# Altium PCB PCB1.PcbDoc
Units mil, origin at the board's own origin, x right, y up, seen from the top; angles counter-clockwise.
Board outline 3090 x 1190 mil, 4 copper layers (Top Layer, Inner Layer 1, Inner Layer 2, Bottom Layer), stack 61.34 mil thick; 31 components, 23 nets, 125 pads, 151 vias.
Unrouted connection lines stored in the file: 6.
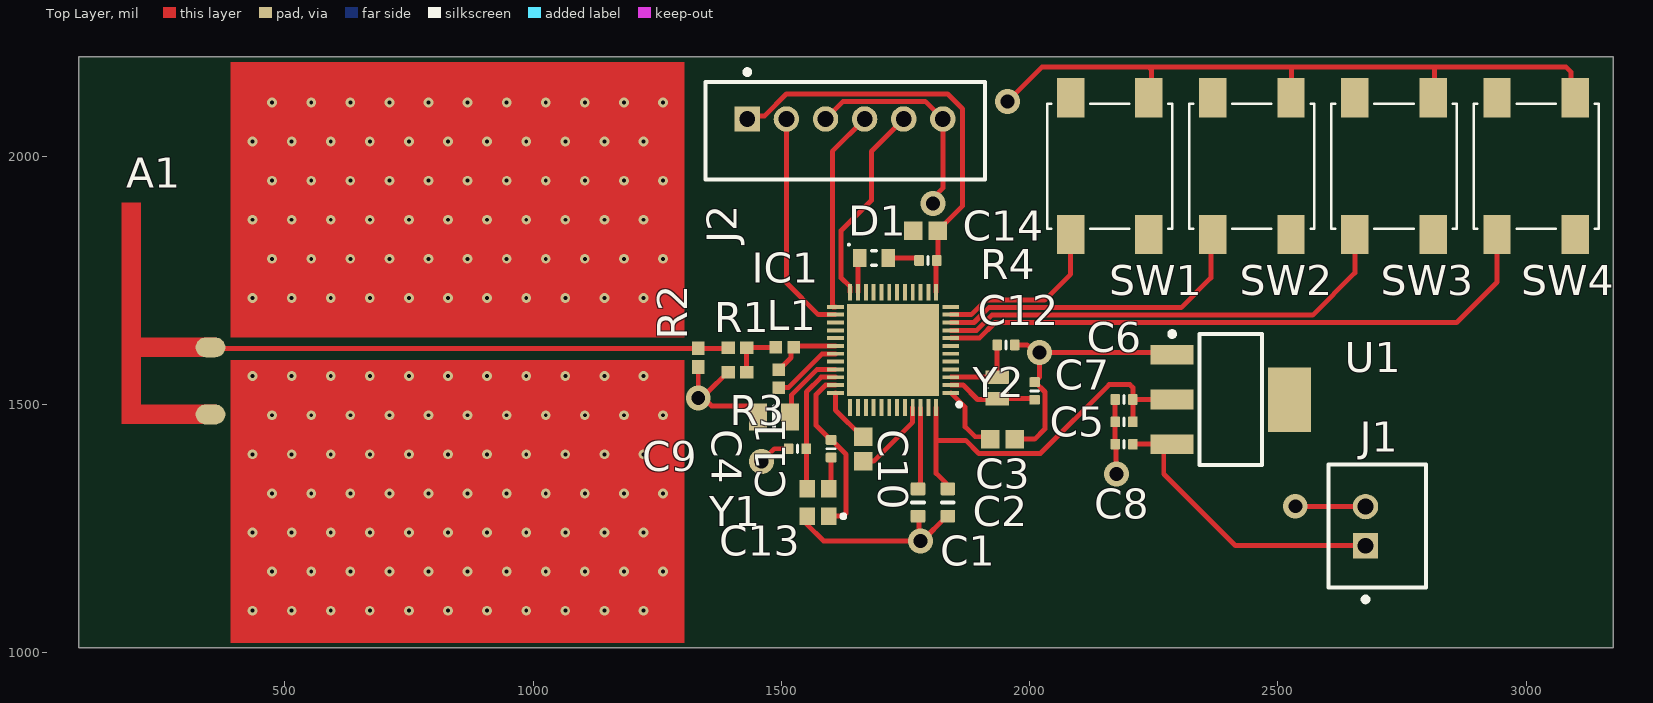
[diagram p0: Top Layer view]
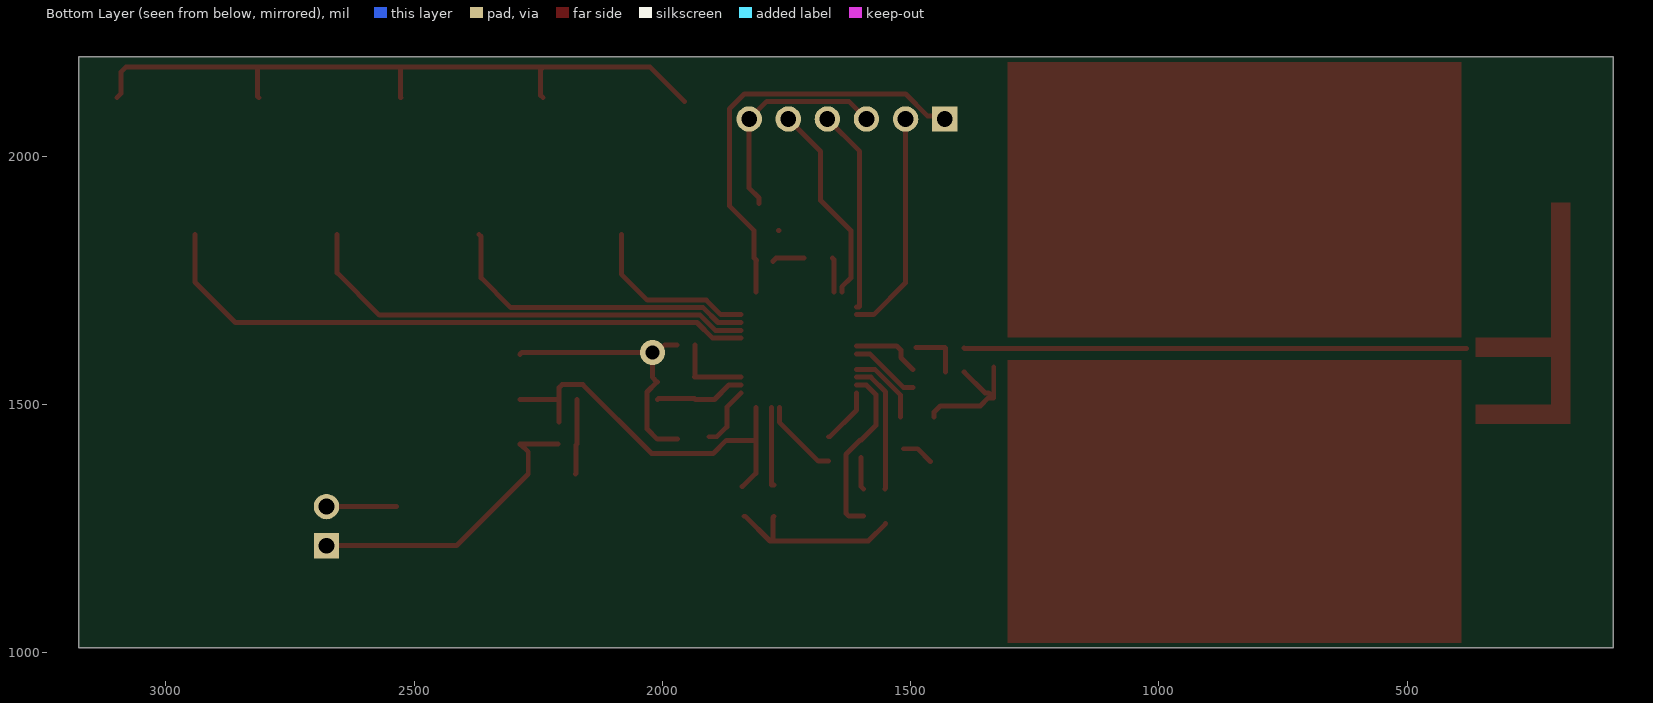
[diagram p1: Bottom Layer view, seen from below]
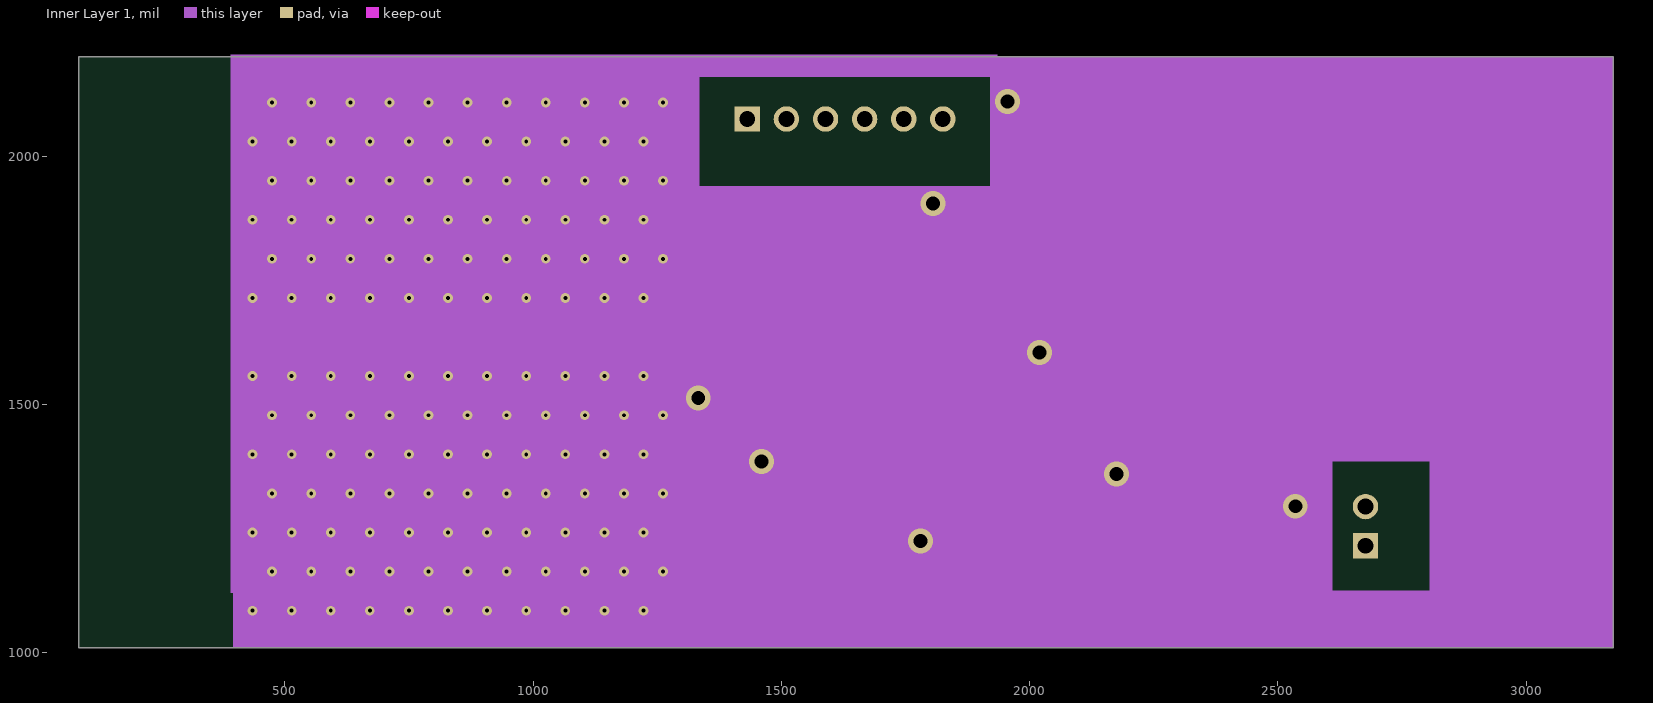
[diagram p2: Inner Layer 1]
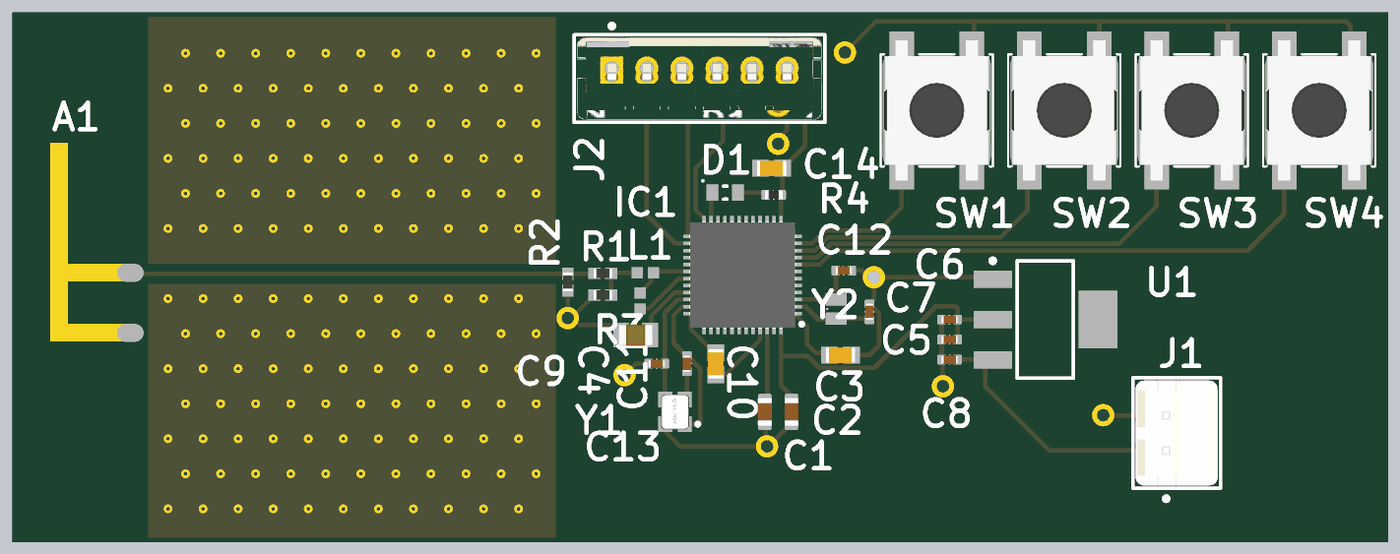
[diagram p3: 3D render of the assembled board from above, using the file's embedded part models]

## Layer stack, top to bottom
Top Solder: solder mask 0.6, Solder Resist, Dk 3.8
Top Layer: signal copper 1.378
Dielectric 1: prepreg 8.583, NP-155F, Dk 4.4
Dielectric 2: prepreg 8.583, NP-155F, Dk 4.4
Dielectric 3: prepreg 7.992, NP-155F, Dk 4.4
Inner Layer 1: signal copper 1.181
Dielectric 4: core 5.906, NP-155F, Dk 4.36
Inner Layer 2: signal copper 1.181
Dielectric 5: prepreg 7.992, NP-155F, Dk 4.4
Dielectric 6: prepreg 8.583, NP-155F, Dk 4.4
Dielectric 7: prepreg 8.583, NP-155F, Dk 4.4
Bottom Layer: signal copper 1.378
Bottom Solder: solder mask 0.6, Solder Resist, Dk 3.8

## Board outline
85,1010 85,2200 3175,2200 3175,1010

## Design rules (kind name [scope] priority, off if disabled: settings)
Clearance [All] p1: gap=5 ignorepadtopadclearanceinfootprint=TRUE
PolygonConnect [All] p1: connectstyle=Relief reliefconductorwidth=10 reliefentries=4 polygonreliefangle="90 Angle" airgapwidth=10
RoutingVias [All] p1: holewidth=28 width=50 viastyle="Through Hole" minholewidth=28 minwidth=50 maxholewidth=28 maxwidth=50
SolderMaskExpansion [All] p1: expansion=0 istentingtop=FALSE
SupplyNets "Schematic Supply Nets" [InNet('GND')] p1: voltage=0.000
Width [All] p1: maxlimit=10 minlimit=10 preferedwidth=10
30 further rules are at their usual default settings.

## Components (designator, comment, footprint, x,y, rotation, side; value= is the part's Value field where it differs from the comment)
A1 "Inverted-F Antenna" "New footprint 1" 190,1617.5 r90 top net-tie
C1 "Capacitor 1µF +/-0.1% 25V 0603" CAPC0603(1608)100_L 1775,1302.44 r90 top value=1µF
C2 "Capacitor 4.7µF +/-20% 10V 0603" CAPC0603(1608)100_L 1835,1302.44 r270 top value=4.7µF
C3 "Capacitor 100 nF +/-10% 50 V 0603" CAPC1608X90X40NL10T20 1945,1430 r180 top value=100nF
C4 "Capacitor 12pF +/-10% 50V 0402" CAPC0402(1005)33_L 1600,1410.83 r270 top value=12pF
C5 "Capacitor 12pF +/-10% 50V 0402" CAPC0402(1005)33_L 2190,1465 r0 top value=10uF
C6 "Capacitor 12pF +/-10% 50V 0402" CAPC0402(1005)33_L 2190,1510 r0 top value=10nF
C7 "Capacitor 12pF +/-10% 50V 0402" CAPC0402(1005)33_L 2010,1527.28 r270 top value=12pF
C8 "Capacitor 12pF +/-10% 50V 0402" CAPC0402(1005)33_L 2190,1420 r0 top value=10uF
C9 "Capacitor 12pF +/-10% 50V 0402" CAPC0402(1005)33_L 1532.28,1410.81 r180 top value=12pF
C10 "Capacitor 100 nF +/-10% 50 V 0603" CAPC1608X90X40NL10T20 1665,1410.39 r90 top value=100nF
C11 "100pF" CAPC2012X135N 1485,1475 r0 top
C12 "Capacitor 12pF +/-10% 50V 0402" CAPC0402(1005)33_L 1952.28,1620 r180 top value=12pF
C13 "04023J0R8ABSTR" CAPC1005X06N 1495,1551.89 r270 top value=0.8pF
C14 "Capacitor 100 nF +/-10% 50 V 0603" CAPC1608X90X40NL10T20 1790.39,1850 r0 top value=100nF
D1 "LED_STATUS" CAPCP1508X06N 1686.26,1795 r0 top
IC1 "NRF52810-QFAA-R" QFN40P600X600X90-49N-D 1725,1610 r180 top
J1 "LiPo CONN" FP-440054-2-MFG 2700,1255 r270 top
J2 "440054-6" FP-440054-6-MFG 1628.15,2051.38 r180 top
L1 "0402R-3N9J" CAPC1005X06N 1506.89,1615 r180 top value=3.9nH
R1 "Resistor 0R 0402 63 mW" RESC1005X40X25ML05T10 1411.3,1614.02 r0 top value=0
R2 "Resistor 0R 0402 63 mW" RESC1005X40X25ML05T10 1332.4,1594.33 r90 top value=0
R3 "Resistor 0R 0402 63 mW" RESC1005X40X25ML05T10 1411.3,1565 r0 top value=0
R4 "Resistor 2K2  +/-5 % 0402 63 mW" RESC0402(1005)_L 1795,1790 r0 top value=2.2k
SW1 "Switch" 430471035826 2161.26,1980 r90 top
SW2 "Switch" 430471035826 2447.51,1980 r90 top
SW3 "Switch" 430471035826 2733.75,1980 r90 top
SW4 "Switch" 430471035826 3020,1980 r90 top
U1 "TC2117-3.3VDBTR" SOT-223-DB3_N 2405,1510 r0 top
Y1 "ABM11AIG-32.000MHZ-4Z-T3" ABM11AIG16000MHZ81ZT 1573.35,1302.44 r90 top
Y2 "32,768kHz" 1TJH125DR1A0058 1935,1533.35 r270 top

## Footprints (in the part's own frame and the unit in brackets; to place one, negate y for a bottom-side part, rotate by r counter-clockwise, add the part's x,y. Pads: shape width x height; smd on the part's side, far side on the other; paste and mask are expansions set on the pad)
1TJH125DR1A0058 [mm]
  rect 0.7x1.2 smd: 1(-0.55,0) 2(0.55,0)
  silkscreen extent 0,-0.55 0,0.55
430471035826 [mm] "SMD Tact Switch, body 6x6mm"
  rect 2x1.4 smd: A1(-3.5,2) A2(3.5,2) B1(-3.5,-2) B2(3.5,-2)
  silkscreen extent -3.2,-3.2 3.2,3.2, body extent -4,-3.1 4,3.1, height 3.5
ABM11AIG16000MHZ81ZT [mm]
  rect 0.9x0.8 smd: 1(-0.7,-0.55) 2(0.7,-0.55) 3(0.7,0.55) 4(-0.7,0.55)
  silkscreen extent -0.8,-1.4 -0.6,-1.2, body extent -1,-0.8 1,0.8, height 0.55
CAPC0402(1005)33_L [mm] "Chip Capacitor, Body 1.0x0.5mm, Height 0.33mm, IPC High Density"
  rrect25% 0.5x0.55 smd: 1(-0.45,0) 2(0.45,0)
  silkscreen extent 0,-0.2 0,0.2, body extent -0.5,-0.25 0.5,0.25, height 0.55
CAPC0603(1608)100_L [mm] "Chip Capacitor, Body 1.6x0.8mm, Height 1.0mm, IPC High Density"
  rrect25% 0.66x0.76 smd: 1(-0.7,0) 2(0.7,0)
  silkscreen extent 0,-0.3 0,0.3, body extent -0.8,-0.4 0.8,0.4, height 0.95
CAPC1005X06N [mm] "Chip Capacitor, 2-Leads, Body 1,00x0,50mm, IPC Medium Density"
  rect 0.64x0.64 smd: 1(-0.46,0) 2(0.46,0)
  body extent -0.55,-0.3 0.55,0.3, height 0.6
CAPC1608X90X40NL10T20 [mm] "Chip Capacitor, 2-Leads, Body 1.70x0.90mm, IPC Medium Density"
  rect 0.95x0.95 smd: 1(-0.625,0) 2(0.625,0)
  body extent -0.85,-0.45 0.85,0.45, height 0.9
CAPC2012X135N [mm]
  rect 0.91x1.39 smd: 1(-0.82,0) 2(0.82,0)
  silkscreen extent 0,-0.53 0,0.53, body extent -1,-0.63 1,0.63, height 1.35
CAPCP1508X06N [mm] "Chip Capacitor, 2-Leads, Body 1,55x0,80mm, IPC Medium Density"
  rect 0.68x0.94 smd: 1(-0.73,0) 2(0.73,0)
  silkscreen extent -1.33,-0.37 0.1,0.73, body extent -0.85,-0.45 0.85,0.45, height 0.6
FP-440054-2-MFG [mm]
  rect 1.3x1.3 hole 0.8 paste-2539.97 mask+0: 1(1,-0.6)
  round 1.3 hole 0.8 paste-2539.97 mask+0: 2(-1,-0.6)
  silkscreen extent -3.15,-2.5 3.87,2.5, body extent -3.25,-2.6 3.25,2.6, height 0.25
FP-440054-6-MFG [mm]
  rect 1.3x1.3 hole 0.8 paste-2539.97 mask+0: 1(5,-0.6)
  round 1.3 hole 0.8 paste-2539.97 mask+0: 2(3,-0.6) 3(1,-0.6) 4(-1,-0.6) 5(-3,-0.6) 6(-5,-0.6)
  silkscreen extent -7.15,-3.12 7.15,2.5, body extent -7.25,-2.6 7.25,2.6, height 0.25
"New footprint 1" [mil]
  oval 40x60 smd: 1(-2.5,-160) 2(-137.5,-160)
  Top Layer region: 289.59,-20 289.59,19.37 -156.87,19.37 -156.87,-20
  Top Layer region: -21.87,-171.97 17.5,-171.97 17.5,19.37 -21.87,19.37
  Top Layer region: -156.87,-171.97 -117.5,-171.97 -117.5,19.37 -156.87,19.37
QFN40P600X600X90-49N-D [mm]
  rect 0.85x0.2 smd: 1(-2.95,2.2) 2(-2.95,1.8) 3(-2.95,1.4) 4(-2.95,1) 5(-2.95,0.6) 6(-2.95,0.2) 7(-2.95,-0.2) 8(-2.95,-0.6) 9(-2.95,-1) 10(-2.95,-1.4) 11(-2.95,-1.8) 12(-2.95,-2.2) 25(2.95,-2.2) 26(2.95,-1.8) 27(2.95,-1.4) 28(2.95,-1) 29(2.95,-0.6) 30(2.95,-0.2) 31(2.95,0.2) 32(2.95,0.6) 33(2.95,1) 34(2.95,1.4) 35(2.95,1.8) 36(2.95,2.2)
  rect 0.2x0.85 smd: 13(-2.2,-2.95) 14(-1.8,-2.95) 15(-1.4,-2.95) 16(-1,-2.95) 17(-0.6,-2.95) 18(-0.2,-2.95) 19(0.2,-2.95) 20(0.6,-2.95) 21(1,-2.95) 22(1.4,-2.95) 23(1.8,-2.95) 24(2.2,-2.95) 37(2.2,2.95) 38(1.8,2.95) 39(1.4,2.95) 40(1,2.95) 41(0.6,2.95) 42(0.2,2.95) 43(-0.2,2.95) 44(-0.6,2.95) 45(-1,2.95) 46(-1.4,2.95) 47(-1.8,2.95) 48(-2.2,2.95)
  rect 4.7x4.7 smd: 49(0,0)
  silkscreen extent -3.47,2.7 -3.28,2.9, body extent -3.05,-3.05 3.05,3.05, height 0.9
RESC0402(1005)_L [mm] "Chip Resistor, Body 1.0x0.5mm, IPC High Density"
  rrect25% 0.5x0.55 smd: 1(-0.45,0) 2(0.45,0)
  silkscreen extent 0,-0.2 0,0.2, body extent -0.5,-0.25 0.5,0.25, height 0.3
RESC1005X40X25ML05T10 [mm] "Chip Resistor, 2-Leads, Body 1.05x0.55mm, IPC Low Density"
  rect 0.7x0.65 smd: 1(-0.475,0) 2(0.475,0)
  body extent -0.53,-0.28 0.53,0.28, height 0.4
SOT-223-DB3_N [mm] "SOT223, 4-Leads, Body 6.5x3.5mm, Pitch 2.3mm, Lead Span 7mm, IPC Medium Density"
  rect 2.2x1 smd: 1(-3,2.3) 2(-3,0) 3(-3,-2.3)
  rect 2.2x3.3 smd: 4(3,0)
  silkscreen extent -3.12,-3.35 1.6,3.47, body extent -1.85,-3.35 1.85,3.35, height 1.8

## Part data
A1: library part CMP-00025-00003-2, "FR4 material 2.48GHz Inverted-F antenna", Frequency=2.4GHz
C1: library part CMP-001-00055-4, "Chip Capacitor, 1µF +/-0.1%, 25V, 0603, Thickness 1 mm", Case/Package=0603, Max Operating Temperature=85°C, Min Operating Temperature=-55°C, Tolerance=20%, Voltage Rating=25V, Mounting Technology=SMT, Pins=2
C2: library part CMP-001-00076-4, "Chip Capacitor, 4.7µF +/-20%, 10V, 0603, Thickness 1 mm", Case/Package=0603, Max Operating Temperature=85°C, Min Operating Temperature=-55°C, Tolerance=10%, Voltage Rating=10V, Mounting Technology=SMT, Pins=2
C3 C10 C14: library part CMP-001-00017-6, "Chip Capacitor, 100 nF, +/- 10%, 50 V, 0603 (1608 Metric)", Capacitor Type=Ceramic, Case/Package=0603, Max Operating Temperature=125°C, Min Operating Temperature=-55°C, Tolerance=10%, Voltage Rating=50V, Mounting Technology=SM, Pins=2, RoHS Compliant=True
C4 C5 C6 C7 C8 C9 C12: library part CMP-001-00072-4, "Chip Capacitor, 12pF +/-10%, 50V, 0402, Thickness 0.33 mm", Case/Package=0402, Max Operating Temperature=85°C, Min Operating Temperature=-55°C, Tolerance=20%, Voltage Rating=50V, Mounting Technology=SMT, Pins=2
C11: library part CL21C101JC61PNC, "Capacitor", Manufacturer_Name=SAMSUNG, Mouser Part Number=187-CL21C101JC61PNC, Arrow Part Number=CL21C101JC61PNC, Arrow Price/Stock=https://www.arrow.com/en/products/cl21c101jc61pnc/samsung-electro-mechanics?utm_currency=USD&region=nac, Datasheet Link=https://datasheet.datasheetarchive.com/originals/distributors/Datasheets-DGA8/2472830.pdf, Height=1.35mm, Manufacturer_Part_Number=CL21C101JC61PNC, Mouser Price/Stock=https://www.mouser.co.uk/ProductDetail/Samsung-Electro-Mechanics/CL21C101JC61PNC?qs=Ay79KZaUeZC4hCSSt5%2FdPg%3D%3D
C13: library part CMP-001-00091-1, "0402 0.8 pF 25 V ±0.5 pF Tolerance SMT Thin-Film RF/Microwave Capacitor", Case/Package=0402, Max Operating Temperature=125°C, Min Operating Temperature=-55°C, Voltage Rating=25V, Mounting Technology="Surface Mount", Pins=2
D1: library part CMP-004-00034-1, "1.6 X 0.8 MM SMD CHIP LED LAMP Single Color LED, Green, Water Clear, 0.7mm", Case/Package=0603, Forward Current=25mA, Forward Voltage=3.3V, Max Operating Temperature=85°C, Min Operating Temperature=-40°C, Mounting Technology="Surface Mount"
IC1: "Integrated Circuit", Manufacturer_Name="Nordic Semiconductor", Mouser Part Number=949-NRF52810-QFAA-R, Arrow Part Number=NRF52810-QFAA-R, Arrow Price/Stock=https://www.arrow.com/en/products/nrf52810-qfaa-r/nordic-semiconductor?utm_currency=USD&region=nac, Datasheet Link=http://infocenter.nordicsemi.com/pdf/nRF52810_PS_v1.0.pdf, Height=0.9mm, Manufacturer_Part_Number=NRF52810-QFAA-R, Mouser Price/Stock=https://www.mouser.co.uk/ProductDetail/Nordic-Semiconductor/NRF52810-QFAA-R?qs=gt1LBUVyoHmUcm9gtTuf%252BA%3D%3D
J1: library part CMP-03369-000005-1, "CONN HEADER VERT 2POS 2MM", Current Rating=3A, Manufacturer="TE Connectivity", Manufacturer Part Number=440054-2, Temperature="-25°C to +85°C", Temperature Range High=+85°C, Temperature Range Low=-25°C, Voltage Rating=250V, Automotive=No, Category=Conn, ComponentLink2Description=Datasheet, ComponentLink2URL=https://www.te.com/usa-en/product-440054-2.datasheet.pdf, Conn Gender=Male, Conn Orientation=Vertical, Contact Material=Tin,Nickel, Device Class L1=Connectors, Device Class L2="Headers and Wire Housings", Device Class L3=unset, Digikey Description="CONN HEADER VERT 2POS 2MM", Footprint Url=https://www.te.com/commerce/DocumentDelivery/DDEController?Action=showdoc&DocId=Customer+Drawing%7F440054%7FF6%7Fpdf%7FEnglish%7FENG_CD_440054_F6.pdf%7F440054-2, Height=6.35mm, Lead Free=Yes, Mouser Description="Headers & Wire Housings 2.0mm HDR 2pos VERT HPI", Number Of Contacts=2, Number Of Rows=1, Octopart=https://octopart.com/440054-2-te+connectivity-40237927, Package=440054-2, Pitch=2mm, RoHS=TRUE
J2: library part CMP-002-00074-1, "Pin Header, Wire-to-Board, 2 mm, 1 Rows, 6 Contacts, Through Hole Straight, HPI Series", Max Operating Temperature=85°C, Min Operating Temperature=-25°C, Voltage Rating=250V, Connector Type="Header, Pin, Plug", Mounting Technology="Through Hole", Pins=6
L1: library part CMP-006-00024-1, "General Purpose Inductor, 0.0039uH, 5%, 1 Element, Ceramic-Core, SMD, 0402", Case/Package=0402, Current Rating=840mA, Max Operating Temperature=125°C, Min Operating Temperature=-40°C, Self Resonant Frequency=5.8GHz, Tolerance=5%, Max Current Rating=840mA, Mounting Technology="Surface Mount"
R1 R2 R3: library part CMP-009-00004-5, "Chip Resistor, 0 Ohm, 0.063 W, -55 to 155 degC, 0402 (1005 Metric)", Case/Package=0402, Max Operating Temperature=155°C, Min Operating Temperature=-55°C, Power=63mW, Voltage Rating=50V, Mounting Technology=SM, Pins=2, RoHS Compliant=True
R4: library part CMP-009-00166-3, "Chip Resistor, 2,2 kOhms, +/-5 %, 63 mW, -55 to 155 degC, 0402", Case/Package=0402, Max Operating Temperature=155°C, Min Operating Temperature=-55°C, Power=63mW, Tolerance=5%, Pins=2
SW1 SW2 SW3 SW4: library part CMP-011-00014-1, "Tactile Switch, 0.05A, 12Vdc, 260Gf, Smd Rohs Compliant: Yes", Current Rating=50mA, Max Operating Temperature=85°C, Min Operating Temperature=-40°C, Voltage Rating=12V, Throw Configuration=SPST
U1: library part CMP-0136-00509-2, "800 mA Fixed Low Dropout Positive Regulator, 3-Pin SOT-223, Extended Temperature, Tape and Reel", DatasheetVersion="revD, Sep-2010", PackageDescription="3-Lead Plastic Small Outline Transistor (DB) [SOT-223]", PackageReference=SOT-223-DB3, PackageVersion="revBB, Aug-2009"
Y1: "Crystal or Oscillator", Manufacturer_Name=ABRACON, Mouser Part Number=815-M11AIG-32-4ZT3, Arrow Part Number=ABM11AIG-32.000MHZ-4Z-T3, Arrow Price/Stock=https://www.arrow.com/en/products/abm11aig-32.000mhz-4z-t3/abracon.html?utm_currency=USD&region=nac, Datasheet Link=https://abracon.com/AIGcrystals/ABM11AIG.pdf, Height=0.55mm, Manufacturer_Part_Number=ABM11AIG-32.000MHZ-4Z-T3, Mouser Price/Stock=https://www.mouser.co.uk/ProductDetail/ABRACON/ABM11AIG-32.000MHZ-4Z-T3?qs=gG6m684uYP6ePIn58i2qHg%3D%3D
Y2: library part 1TJH125DR1A0058, "Crystal or Oscillator", Manufacturer_Name="KDS Daishinku", Datasheet Link=https://datasheet.lcsc.com/szlcsc/1810301228_KDS-Daishinku-1TJH125DR1A0058_C253734.pdf, Height=0.5mm, Manufacturer_Part_Number=1TJH125DR1A0058

## Via types
v1: diameter 19.68, hole 7.87, Top Layer to Inner Layer 1, 143 vias
v2: diameter 50, hole 28, Top Layer to Inner Layer 1, 7 vias
v3: diameter 50, hole 28, Top Layer to Bottom Layer, 1 vias

## Nets (pads, with @x,y where several pads share a name; then routed paths per layer and width w, separated by ;. In a path a pad name is that pad's centre, name@x,y a point inside that pad or via, vN(x,y) a via of type N, cw(c..) or ccw(c..) an arc to the next point about the centre after c; other vN are vias at no path point)
GND: A1.2 C1.1 C2.2 C3.1 C4.2 C5.1 C6.1 C7.1 C8.1 C9.2 C10.1 C11.1 C12.1 C14.1 IC1.45 J1.2 J2.3 J2.6 R2.1 R3.1 SW1.B2 SW2.B2 SW3.B2 SW4.B2 U1.1 Y1.2 Y1.4 | length 3665.9
  Top Layer w10: R2.1 v2(1332.4,1513.23) ; R3.1 1391.61,1565 1350.04,1523.42 1342.6,1523.42 v2(1332.4,1513.23) ; C11.1 1452.72,1484.45 1439.8,1497.36 1359.09,1497.36 1343.23,1513.23 v2(1332.4,1513.23) ; v2(1460,1385) 1485.81,1410.81 C9.2 ; Y1.4@1550,1260 1585,1225 v2(1780,1225) ; J2.3 1624.37,2110.59 1789.41,2110.59 J2.6 1825,1935.82 1805,1915.82 v2(1805,1905) ; Y1.2 1600,1335 C4.2 ; C10.1 1685.79,1385.79 1764.37,1464.37 IC1.45 ; C14.1@1765,1850.79 C14.1 ; C1.1 1777.5,1272.38 1777.5,1227.5 v2(1780,1225) ; C2.2 1833.04,1274.88 1783.16,1225 v2(1780,1225) ; v2(1955,2110) 2025,2180 2239.14,2180 ; C3.1 2010,1430 2030.83,1450.83 2030.83,1525.16 C7.1@2010.98,1545 ; C12.1 1994.84,1620 2009.84,1605 v3(2020,1605) ; C7.1 C7.1@2010.98,1545 ; C6.1 C5.1 C8.1 2173.64,1418.64 2173.64,1361.36 v2(2175,1360) ; SW1.B2 2245,2122.8 2245,2174.14 2239.14,2180 ; U1.1 2282.44,1605 v3(2020,1605) ; SW2.B2 2527.07,2118.62 2527.07,2180 ; v2(2535,1295) 2535.31,1294.69 2676.06,1294.69 J1.2 ; SW3.B2 2815,2120.3 2815,2180 ; SW4.B2 3090,2126.54 3090,2170 3080,2180 2815,2180 ; C7.1@2010.98,1545 2015.83,1549.84 2015.83,1550.83 2020,1555 v3(2020,1605) ; 2239.14,2180 2527.07,2180 ; 2527.07,2180 2815,2180
  other v1: 434.73,1084.65 513.47,1084.65 592.21,1084.65 670.95,1084.65 749.69,1084.65 828.43,1084.65 907.17,1084.65 985.91,1084.65 1064.65,1084.65 1143.39,1084.65 1222.13,1084.65 474.1,1163.39 552.84,1163.39 631.58,1163.39 710.32,1163.39 789.06,1163.39 867.8,1163.39 946.54,1163.39 1025.28,1163.39 1104.02,1163.39 1182.76,1163.39 1261.5,1163.39 434.73,1242.13 513.47,1242.13 592.21,1242.13 670.95,1242.13 749.69,1242.13 828.43,1242.13 907.17,1242.13 985.91,1242.13 1064.65,1242.13 1143.39,1242.13 1222.13,1242.13 474.1,1320.87 552.84,1320.87 631.58,1320.87 710.32,1320.87 789.06,1320.87 867.8,1320.87 946.54,1320.87 1025.28,1320.87 1104.02,1320.87 1182.76,1320.87 1261.5,1320.87 434.73,1399.61 513.47,1399.61 592.21,1399.61 670.95,1399.61 749.69,1399.61 828.43,1399.61 907.17,1399.61 985.91,1399.61 1064.65,1399.61 1143.39,1399.61 1222.13,1399.61 474.1,1478.35 552.84,1478.35 631.58,1478.35 710.32,1478.35 789.06,1478.35 867.8,1478.35 946.54,1478.35 1025.28,1478.35 1104.02,1478.35 1182.76,1478.35 1261.5,1478.35 434.73,1557.09 513.47,1557.09 592.21,1557.09 670.95,1557.09 749.69,1557.09 828.43,1557.09 907.17,1557.09 985.91,1557.09 1064.65,1557.09 1143.39,1557.09 1222.13,1557.09 434.73,1714.57 513.47,1714.57 592.21,1714.57 670.95,1714.57 749.69,1714.57 828.43,1714.57 907.17,1714.57 985.91,1714.57 1064.65,1714.57 1143.39,1714.57 1222.13,1714.57 474.1,1793.31 552.84,1793.31 631.58,1793.31 710.32,1793.31 789.06,1793.31 867.8,1793.31 946.54,1793.31 1025.28,1793.31 1104.02,1793.31 1182.76,1793.31 1261.5,1793.31 434.73,1872.05 513.47,1872.05 592.21,1872.05 670.95,1872.05 749.69,1872.05 828.43,1872.05 907.17,1872.05 985.91,1872.05 1064.65,1872.05 1143.39,1872.05 1222.13,1872.05 474.1,1950.79 552.84,1950.79 631.58,1950.79 710.32,1950.79 789.06,1950.79 867.8,1950.79 946.54,1950.79 1025.28,1950.79 1104.02,1950.79 1182.76,1950.79 1261.5,1950.79 434.73,2029.53 513.47,2029.53 592.21,2029.53 670.95,2029.53 749.69,2029.53 828.43,2029.53 907.17,2029.53 985.91,2029.53 1064.65,2029.53 1143.39,2029.53 1222.13,2029.53 474.1,2108.27 552.84,2108.27 631.58,2108.27 710.32,2108.27 789.06,2108.27 867.8,2108.27 946.54,2108.27 1025.28,2108.27 1104.02,2108.27 1182.76,2108.27 1261.5,2108.27
NetA1_1: A1.1 R1.1 R2.2 | length 1013
  Top Layer w10: 380,1613.03 R2.2 1391.61,1613.03 R1.1
NetC1_2: C1.2 IC1.46 | length 161.2
  Top Layer w10: C1.2@1775,1337.56 1779.68,1337.56 1780.12,1338 IC1.46
NetC3_2: C3.2 IC1.1 | length 124.4
  Top Layer w10: IC1.1 1870,1494.53 1870,1455 1890,1435 C3.2@1905.79,1435
NetC4_1: C4.1 IC1.35 Y1.1 | length 349.4
  Top Layer w10: Y1.1 1595.12,1275 1624.14,1275 1630,1280.86 1630,1399.53 1600.98,1428.55 C4.1 1599.02,1428.55 1570,1457.57 1570,1520 1589.13,1539.13 IC1.35
NetC7_2: C7.2 IC1.2 Y2.2 | length 182.5
  Top Layer w10: IC1.2 1865.87,1539.13 1895,1510 1933.31,1510 Y2.2 2007.87,1511.69 C7.2
NetC8_2: C8.2 J1.1 U1.3 | length 611
  Top Layer w10: C8.2@2210,1420 2286.34,1420 U1.3 2284.69,1419.45 2270,1404.76 2270,1360 2414.37,1215.63 J1.1
NetC9_1: C9.1 IC1.34 Y1.3 | length 266.9
  Top Layer w10: Y1.3 1550,1331.69 C9.1 1550,1525 1579.88,1554.88 IC1.34
NetC11_2: C11.2 IC1.33 | length 154.1
  Top Layer w10: C11.2@1520,1475 1520,1518.79 1571.84,1570.63 IC1.33
NetC12_2: C12.2 IC1.3 Y2.1 | length 159
  Top Layer w10: IC1.3 1934.88,1554.88 1934.57,1555.2 C12.2
NetC13_1: C13.1 IC1.30 L1.1 | length 142.5
  Top Layer w10: C13.1 1519.29,1594.29 1519.29,1609.29 1527.87,1617.87 IC1.30
NetC13_2: C13.2 IC1.31 | length 142.2
  Top Layer w10: C13.2 1513.78,1533.78 1582.13,1602.13 IC1.31
NetD1_1: D1.1 IC1.23 | length 70.3
  Top Layer w10: IC1.23 1654.13,1752.28 1654.13,1791.61 D1.1
NetD1_2: D1.2 R4.1 | length 65.6
  Top Layer w10: D1.2 1770.55,1795 1776.97,1788.58 R4.1@1776.97,1787.6
NetIC1_8: IC1.8 SW4.A1 | length 1242.7
  Top Layer w10: IC1.8 1898.62,1633.62 1930,1665 2860,1665 2941.26,1746.26 SW4.A1
NetIC1_9: IC1.9 SW3.A1 | length 939
  Top Layer w10: IC1.9 1893.16,1649.37 1923.79,1680 2570,1680 2655,1765 SW3.A1
NetIC1_10: IC1.10 SW2.A1 | length 649.9
  Top Layer w10: IC1.10 1887.69,1665.12 1917.57,1695 2305,1695 2365,1755 2365,1838.44 SW2.A1
NetIC1_11: IC1.11 SW1.A1 | length 354.9
  Top Layer w10: IC1.11 1882.23,1680.87 1911.36,1710 2030,1710 2082.52,1762.52 SW1.A1
NetIC1_24: IC1.24 J2.5 | length 408.8
  Top Layer w10: IC1.24 1638.39,1736.81 1620,1755.2 1620,1850 1681.26,1911.26 1681.26,2010 J2.5
NetIC1_25: IC1.25 J2.4 | length 411
  Top Layer w10: IC1.25 1603.58,1696.61 1602.52,1697.68 1602.52,2010 J2.4
NetIC1_26: IC1.26 J2.2 | length 455.4
  Top Layer w10: J2.2 1510.04,1940.04 1510,1940 1510,1745 1574.13,1680.87 IC1.26
RF: L1.2 R1.2 R3.2 | length 107.2
  Top Layer w10: R3.2 R1.2@1430,1613.03 ; R1.2 1430.49,1614.51 1488.29,1614.51 L1.2
VDD_nRF: C2.1 C5.2 C6.2 C10.2 C14.2 IC1.13 IC1.36 IC1.48 J2.1 R4.2 U1.2 | length 1757.5
  Top Layer w10: J2.1 1437.62,2081.33 1466.03,2081.33 1510.3,2125.59 1834.41,2125.59 1865,2095 1865,1900 C14.2 1815,1795 R4.2@1810,1790 ; IC1.36 1608.86,1488.57 1662.43,1435 C10.2 ; IC1.48 1811.61,1427.64 ; IC1.13 R4.2@1811.61,1788.39 ; C2.1@1840,1335 1838.04,1335 1811.61,1361.43 1811.61,1427.64 ; C5.2 C6.2 ; U1.2 C6.2 ; 1811.61,1427.64 1871.21,1427.64 1897.55,1401.3 2021.3,1401.3 2160,1540 2201.86,1540 2207.72,1534.14 C6.2
pads on no net: IC1.4 IC1.5 IC1.6 IC1.7 IC1.12 IC1.14 IC1.15 IC1.16 IC1.17 IC1.18 IC1.19 IC1.20 IC1.21 IC1.22 IC1.27 IC1.28 IC1.29 IC1.32 IC1.37 IC1.38 IC1.39 IC1.40 IC1.41 IC1.42 IC1.43 IC1.44 IC1.47 IC1.49 SW1.A2 SW1.B1 SW2.A2 SW2.B1 SW3.A2 SW3.B1 SW4.A2 SW4.B1 U1.4

## Other copper
Top Layer:
  rectangle net GND: 390,1635 1305,2190
  rectangle net GND: 390,1020 1305,1590
Inner Layer 1:
  rectangle net GND: 2870,1010 3175,2200
  rectangle net GND: 1920,1915 2885,2200
  rectangle net GND: 2605,1385 2880,1945
  rectangle net GND: 2805,1115 2880,1415
  rectangle net GND: 1260,2160 1935,2205
  rectangle net GND: 390,1890 1335,2205
  rectangle net GND: 390,1120 2610,1940
  rectangle net GND: 395,1010 2880,1125

## Silkscreen, mask and mechanical layers (free items; w line width, h text height)
Top Assembly:
  the board outline again, w10